# Altium PCB AUX_POWER.PcbDoc
Units mil, origin at the board's own origin, x right, y up, seen from the top; angles counter-clockwise.
Board outline 1340.03 x 1080.03 mil, 2 copper layers (Top Layer, Bottom Layer); 13 components, 6 nets, 33 pads, 0 vias.
Unrouted connection lines stored in the file: 2.
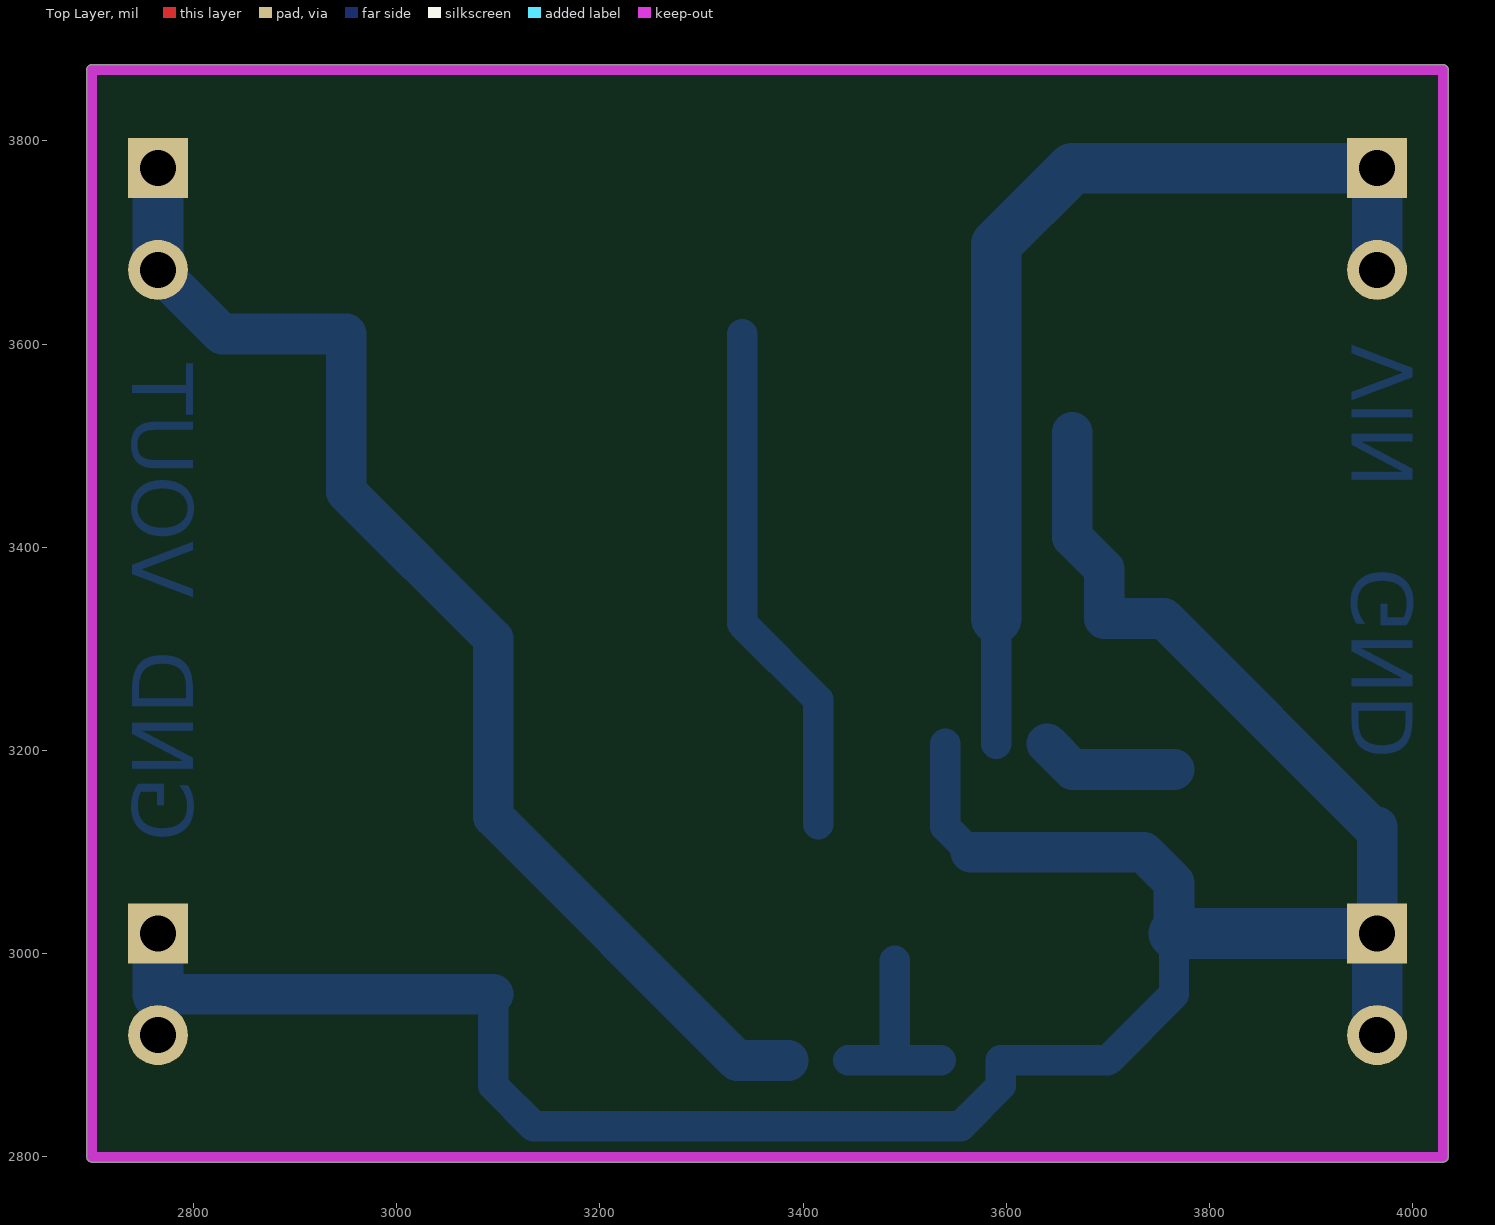
[diagram p0: Top Layer view]
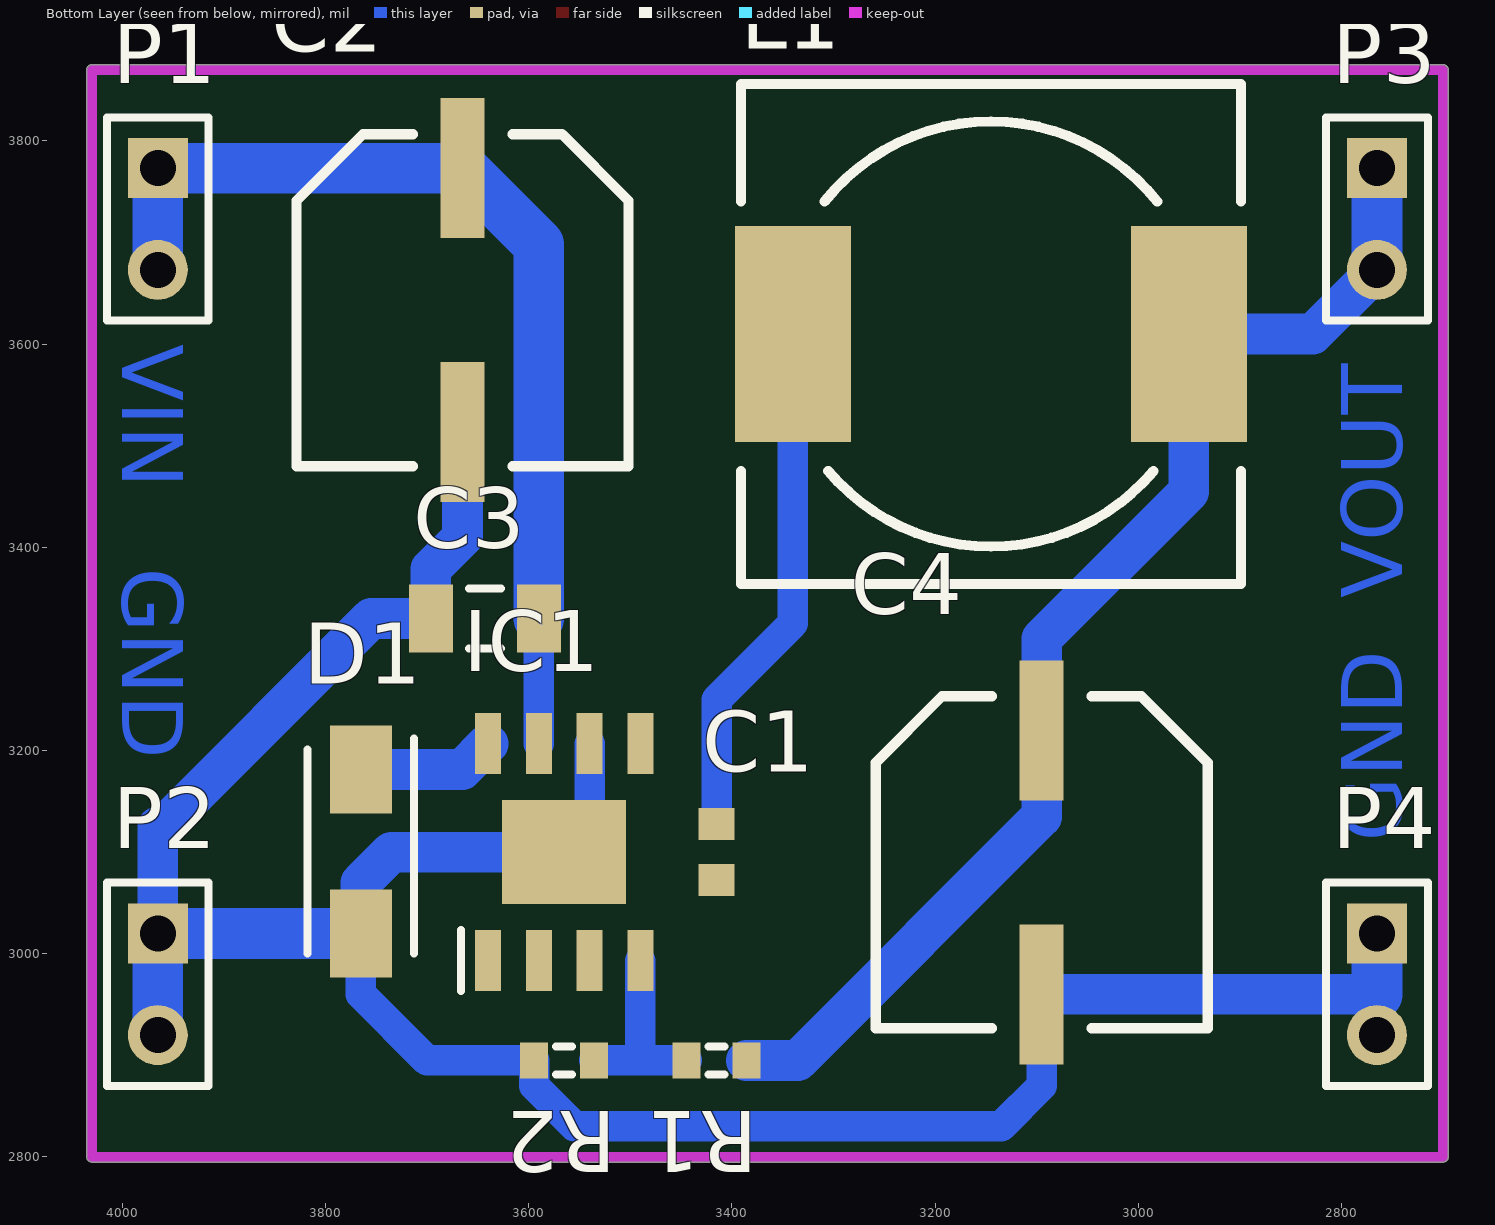
[diagram p1: Bottom Layer view, seen from below]

## Layer stack, top to bottom
Top Solder: solder mask 0.4, Solder Resist, Dk 3.5
Top Layer: signal copper 1.4
Dielectric 1: dielectric 12.6, FR-4, Dk 4.8
Bottom Layer: signal copper 1.4
Bottom Solder: solder mask 0.4, Solder Resist, Dk 3.5

## Board outline
4035.01,2800 cw(c4030,2800) 4030,2794.99 2700,2794.99 cw(c2700,2800) 2694.99,2800 2694.99,3870 cw(c2700,3870) 2700,3875.01 4030,3875.01 cw(c4030,3870) 4035.01,3870

## Design rules (kind name [scope] priority, off if disabled: settings)
Clearance [All] p1: gap=10 ignorepadtopadclearanceinfootprint=FALSE except(0: Arc-Hole Track-Hole SMDPad-Hole THPad-Hole Via-Hole Fill-Hole Poly-Hole Region-Hole Text-Hole)
PolygonConnect [All] p1: connectstyle=Relief reliefconductorwidth=10 reliefentries=4 polygonreliefangle="90 Angle" airgapwidth=10
RoomDefinition AUX_POWER [InComponentClass('AUX_POWER')] p1: confinementstyle=ConfineIn formatcopy=TRUE lockcomponents=FALSE outline 4030,2800 2700,2800 2700,3870 4030,3870
RoutingLayers [All] p1: top layer_v5=FALSE bottom layer_v5=TRUE
RoutingVias [All] p1: holewidth=28 width=50 viastyle="Through Hole" minholewidth=28 minwidth=50 maxholewidth=28 maxwidth=50
SolderMaskExpansion [All] p1: expansion=4
Width [All] p1: maxlimit=50 minlimit=10 preferedwidth=10 minimp=50.000000 maximp=50.000000 favimp=50.000000
29 further rules are at their usual default settings.

## Components (designator, comment, footprint, x,y, rotation, side; value= is the part's Value field where it differs from the comment)
C1 "Cap Semi" 1608[0603] 3415.12,3100 r90 bottom value=10nF
C2 "Cap Pol1" CAP-8*10.5 3665.12,3643.23 r180 bottom value=100uF
C3 "Cap Semi" C1206 3643.27,3330 r180 bottom value=10uF
C4 "Cap Pol1" CAP-8*10.5 3095.12,3090 r180 bottom value=150uF
D1 "US1M-E3_5AT" DIOM5127X229N 3765.12,3100.71 r270 bottom
IC1 "TPS5450QDDARQ1" SOIC127P600X170-9N 3565.12,3100 r90 bottom
L1 "Inductor Iron" CDRH127 3145.12,3610 r180 bottom value=47mH
P1 "Header 2" HDR1X2 3965.12,3773.15 r270 bottom
P2 "Header 2" HDR1X2 3965.12,3020 r270 bottom
P3 "Header 2" HDR1X2 2765.12,3773.15 r270 bottom
P4 "Header 2" HDR1X2 2765.12,3020 r270 bottom
R1 "Res3" J1-0603 3415.12,2895 r180 bottom value=10K
R2 "Res3" J1-0603 3565.12,2895 r0 bottom value=3.24K

## Footprints (in the part's own frame and the unit in brackets; to place one, negate y for a bottom-side part, rotate by r counter-clockwise, add the part's x,y. Pads: shape width x height; smd on the part's side, far side on the other; paste and mask are expansions set on the pad)
1608[0603] [mm] "Chip Capacitor, Body 1.6x0.8mm, IPC High Density"
  rect 0.8x0.9 smd: 1(-0.7,0) 2(0.7,0)
  body extent -0.87,-0.48 0.87,0.48, height 1.3
C1206 [mm] "Chip Capacitor, Body 3.2x1.6mm, IPC High Density"
  rect 1.1x1.7 smd: 1(-1.35,0) 2(1.35,0)
  silkscreen extent -0.4,-0.75 0.4,0.75, body extent -1.7,-0.9 1.7,0.9, height 1.3
CAP-8*10.5 [mm]
  rect 1.1x3.5 smd: 1(0,3.3) 2(0,-3.3)
  silkscreen extent -4.15,-4.15 4.15,4.15, body extent -3.73,-3.73 3.73,3.73, height 10.5
CDRH127 [mm]
  rect 2.9x5.4 smd: 1(-4.95,0) 2(4.95,0)
  silkscreen extent -6.25,-6.25 6.25,6.25, body extent -6,-6 6,6, height 2.8
DIOM5127X229N [mm]
  rect 2.2x1.55 smd: 1(-2.05,0) 2(2.05,0)
  silkscreen extent -2.83,-1.33 2.55,1.33, body extent -2.55,-1.33 2.55,1.33, height 2.29
HDR1X2 [mm] "Connector; Header; 2 Position"
  rect 1.5x1.5 hole 0.9: 1(0,0)
  round 1.5 hole 0.9: 2(2.54,0)
  silkscreen extent -1.27,-1.27 3.81,1.27
J1-0603 [mm] "Chip Resistor, Body 1.6x0.8mm, IPC High Density"
  rect 0.7x0.9 smd: 1(-0.75,0) 2(0.75,0)
  silkscreen extent -0.2,-0.35 0.2,0.35, body extent -0.85,-0.48 0.85,0.48, height 0.9
SOIC127P600X170-9N [mm]
  rect 1.525x0.65 smd: 1(-2.712,1.905) 2(-2.712,0.635) 3(-2.712,-0.635) 4(-2.712,-1.905) 5(2.712,-1.905) 6(2.712,-0.635) 7(2.712,0.635) 8(2.712,1.905)
  rect 2.6x3.1 smd: 9(0,0)
  silkscreen extent -3.47,2.58 -1.95,2.58, body extent -3,-2.45 3,2.45, height 1.7

## Part data
C1 C3: "Capacitor (Semiconductor SIM Model)", LatestRevisionDate=29-May-2009, LatestRevisionNote="IPC-7351 Footprint Added.", PackageDescription="Chip Capacitor", PackageReference=C1206, Published=8-Jun-2000, Publisher="Altium Limited"
C2 C4: "Polarized Capacitor (Radial)", LatestRevisionDate=17-Jul-2002, LatestRevisionNote="Re-released for DXP Platform.", PackageDescription="Polarized Capacitor (Radial); 2 Leads", PackageReference=RB7.6-15, Published=8-Jun-2000, Publisher="Altium Limited"
D1: "Diode", Manufacturer_Name=Vishay, Manufacturer_Part_Number=US1M-E3/5AT, Mouser Part Number=625-US1M-E3/5AT, RS Part Number=9190755, Allied_Number=R1082668, Allied Price/Stock=https://www.alliedelec.com/vishaydale-us1m-e3-5at/R1082668/, Datasheet Link=https://www.vishay.com/docs/88768/us1.pdf, Height=2.29mm, Mouser Price/Stock=https://www.mouser.com/Search/Refine.aspx?Keyword=625-US1M-E3%2F5AT, RS Price/Stock=http://uk.rs-online.com/web/p/products/9190755
IC1: "Integrated Circuit", Manufacturer_Name="Texas Instruments", Mouser Part Number=595-TPS5450QDDARQ1, Datasheet Link=http://www.ti.com/lit/gpn/tps5450-q1, Height=1.7mm, Manufacturer_Part_Number=TPS5450QDDARQ1, Mouser Price/Stock=https://www.mouser.com/Search/Refine.aspx?Keyword=595-TPS5450QDDARQ1
L1: "Magnetic-Core Inductor", LatestRevisionDate=17-Jul-2002, LatestRevisionNote="Re-released for DXP Platform.", PackageDescription="Axial Device, Thru-Hole; 2 Leads; 0.9 in Pin Spacing", PackageReference=AXIAL-0.9, Published=24-Mar-1999, Publisher="Altium Limited"
P1 P2 P3 P4: "Header, 2-Pin", LatestRevisionDate=17-Jul-2002, LatestRevisionNote="Re-released for DXP Platform.", Publisher="Altium Limited"
R1 R2: "Resistor", LatestRevisionDate=29-May-2009, LatestRevisionNote="IPC-7351 Footprint Added.", PackageDescription="Chip Resistor", PackageReference=J1-0603, Published=8-Jun-2000, Publisher="Altium Limited"

## Nets (pads, with @x,y where several pads share a name; then routed paths per layer and width w, separated by ;. In a path a pad name is that pad's centre, name@x,y a point inside that pad or via, vN(x,y) a via of type N, cw(c..) or ccw(c..) an arc to the next point about the centre after c; other vN are vias at no path point)
GND: C2.2 C3.1 C4.2 D1.2 IC1.6 IC1.9 P2.1 P2.2 P4.1 P4.2 R2.2 | length 2629.9
  Bottom Layer w30: C4.2 3095.12,2870 3135.12,2830 3555.12,2830 3555.12,2830.47 3594.65,2870 R2.2 3700.12,2895 3765.12,2960 D1.2 ; IC1.6 3540.12,3125 IC1.9
  Bottom Layer w40: 2765.12,2960 2765.2,2960.08 C4.2 ; IC1.9 3735.12,3100 3765.12,3070 D1.2 ; C2.2 3665.12,3410 3696.42,3378.7 C3.1 3755.12,3330 3960.12,3125 3965.12,3125 P2.1
  Bottom Layer w50: 2765.12,2960 P4.1 ; D1.2 P2.1 P2.2
NetC1_1: C1.1 IC1.1
NetC1_2: C1.2 D1.1 IC1.8 L1.1 | length 649.1
  Bottom Layer w30: L1.1 3340,3325.12 3415.12,3250 C1.2
  Bottom Layer w40: IC1.8 3665.47,3181.42 D1.1
NetIC1_4: IC1.4 R1.1 R2.1 | length 189.2
  Bottom Layer w30: R1.1 3490.12,2895 ; IC1.4 3490.12,2895 ; R2.1 3490.12,2895
VIN: C2.1 C3.2 IC1.7 P1.1 P1.2 | length 997.4
  Bottom Layer w30: IC1.7 C3.2
  Bottom Layer w50: C3.2 3590.12,3698.15 C2.1 P1.1 P1.2
VOUT: C4.1 L1.2 P3.1 P3.2 R1.2 | length 1236.2
  Bottom Layer w40: P3.2 2828.27,3610 L1.2 2950.24,3454.88 3095.12,3310 C4.1 3095.12,3135 3335.12,2895 R1.2
  Bottom Layer w50: P3.2 P3.1
pads on no net: IC1.2 IC1.3 IC1.5

## Keep-outs
Keep-Out Layer:
  lines w10: 2700,2800 2700,3870 4030,3870 4030,2800 2700,2800

## Other copper
Bottom Layer:
  text "VIN" at 4000,3600 h60 r90
  text "GND" at 4000,3380 h60 r90
  text "VOUT" at 2740,3350 h60 r270
  text "GND" at 2740,3110 h60 r270